# Altium PCB MM32F103_LQFP100_CoreBoard V1.1.PcbDoc
Units mil, origin at the board's own origin, x right, y up, seen from the top; angles counter-clockwise.
Board outline 3620 x 2165 mil, 2 copper layers (Top Layer, Bottom Layer); 65 components, 116 nets, 447 pads, 112 vias.
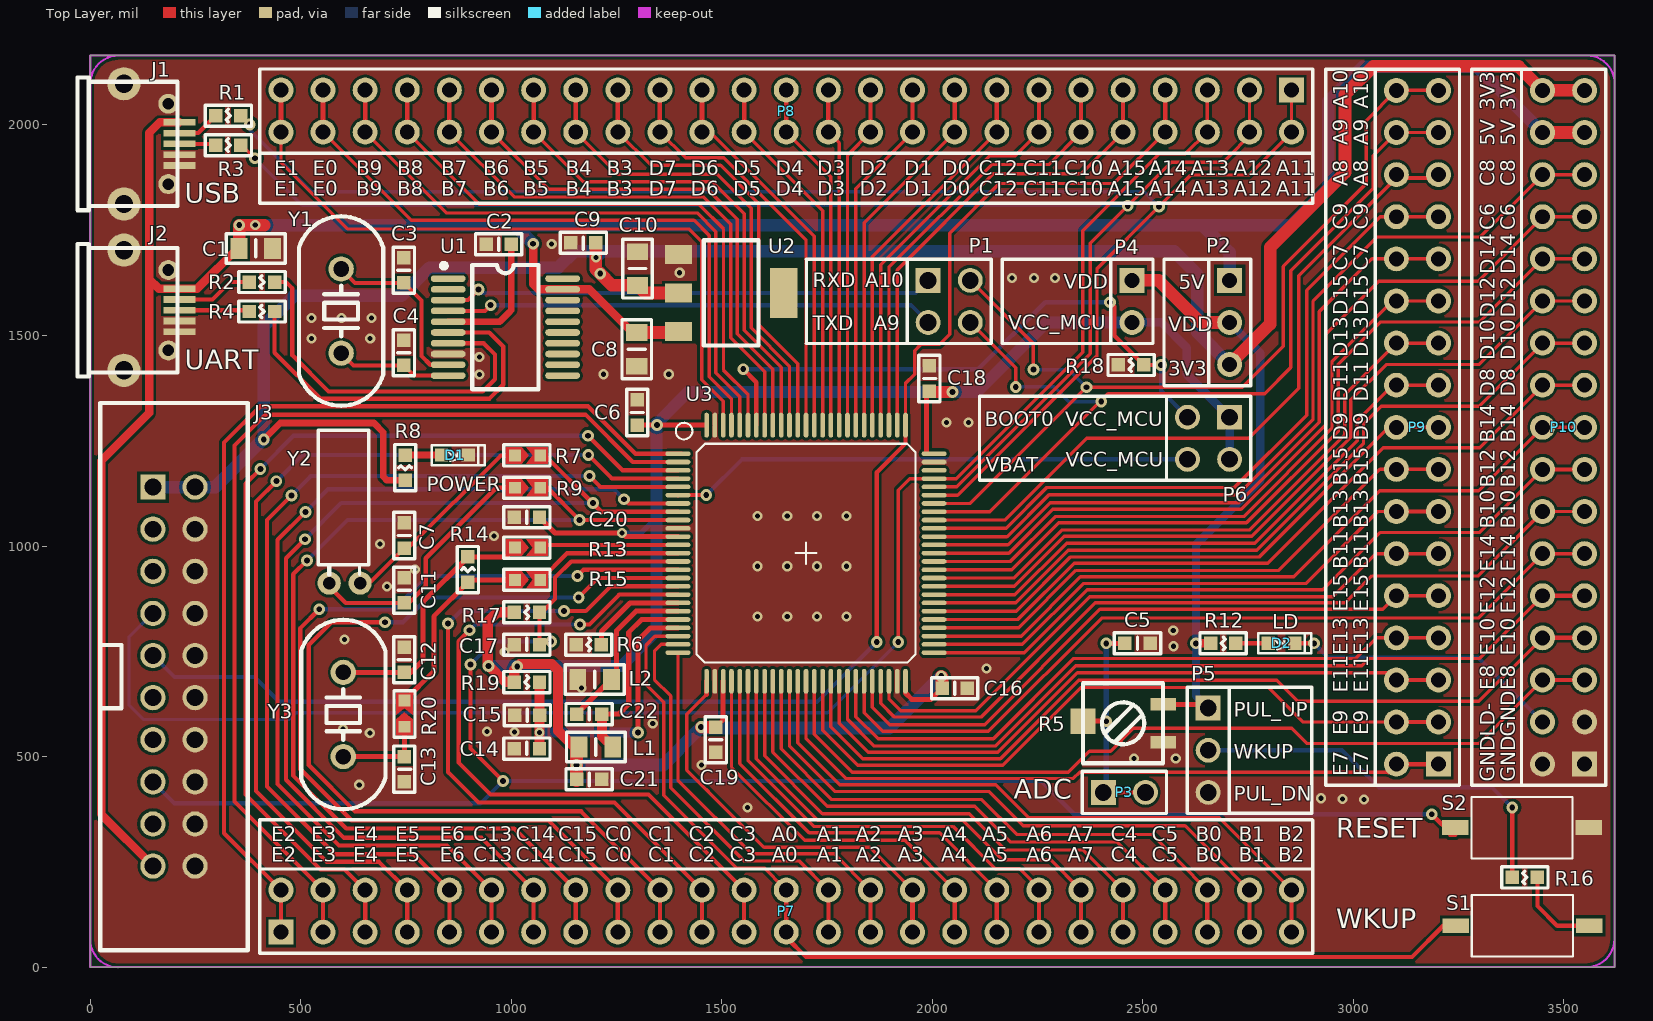
[diagram p0: Top Layer view]
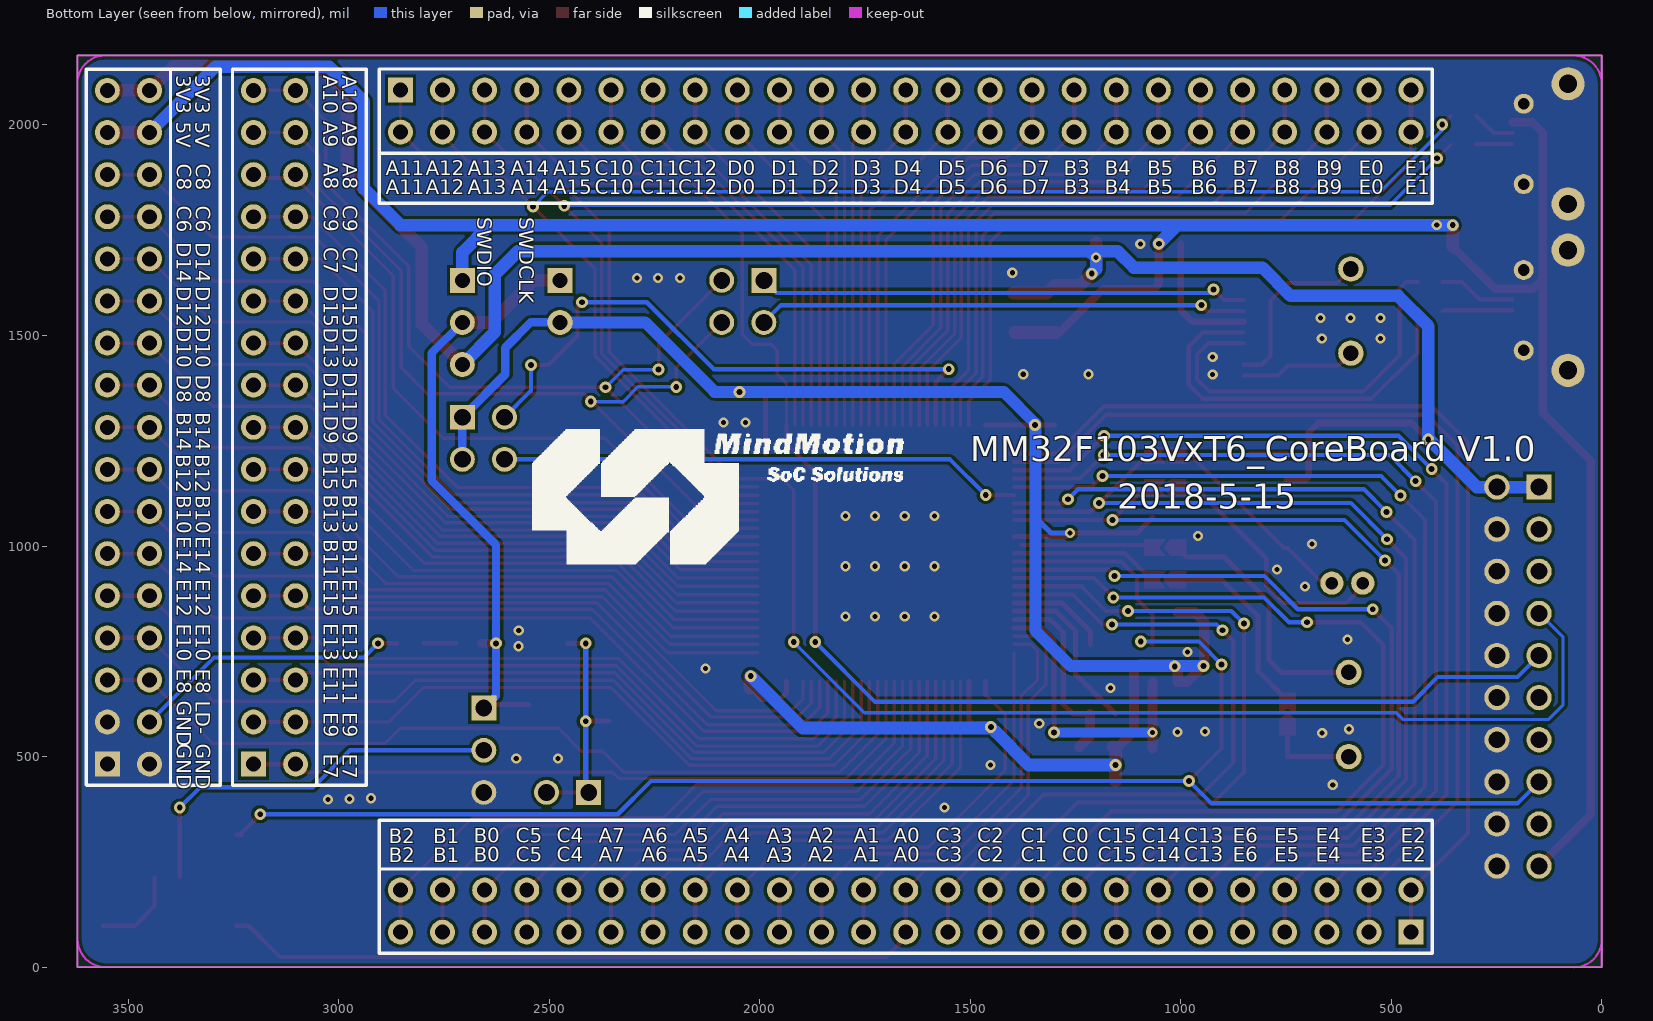
[diagram p1: Bottom Layer view, seen from below]

## Layer stack, top to bottom
Top Layer: signal copper 1.4
Dielectric: dielectric 12.6, FR-4, Dk 4.8
Bottom Layer: signal copper 1.4

## Board outline
0,0 0,2165 3620,2165 3620,0

## Design rules (kind name [scope] priority, off if disabled: settings)
Clearance [All] p1: gap=7
MinimumSolderMaskSliver [All] p1: minsoldermaskwidth=8
PolygonConnect [All] p1: connectstyle=Direct reliefconductorwidth=10 reliefentries=4 polygonreliefangle="90 Angle"
RoutingVias [All] p1: holewidth=28 width=50 viastyle="Through Hole" minholewidth=14 minwidth=28 maxholewidth=30 maxwidth=50
SilkToSilkClearance [All] p1: silktosilkclearance=0
SilkscreenOverComponentPads [All] p1: minsilkscreentomaskgap=8
SolderMaskExpansion [All] p1: expansion=4
Width [All] p1: maxlimit=50 minlimit=8 preferedwidth=10
25 further rules are at their usual default settings.

## Components (designator, comment, footprint, x,y, rotation, side; value= is the part's Value field where it differs from the comment)
C1 "4.7uF" C-0805 393,1707 r180 top
C2 "104" C-0603 970,1717 r0 top
C3 "22pF" C-0603 745,1655 r270 top
C4 "22pF" C-0603 745,1459 r270 top
C5 "104" C-0603 2487.23,769 r180 top
C6 "104" C-0603 1299,1317 r90 top
C7 "15pF" C-0603 746,1025 r270 top
C8 "4.7uF" C-0805 1298,1467 r90 top
C9 "104" C-0603 1171,1720 r0 top
C10 "10uF" C-0805 1300,1659 r270 top
C11 "15pF" C-0603 746,895 r270 top
C12 "22pF" C-0603 746,730 r270 top
C13 "22pF" C-0603 746,470 r90 top
C14 "1uF" C-0603 1037,519 r180 top
C15 "103" C-0603 1038,598 r180 top
C16 "104" C-0603 2053,662 r180 top
C17 "104" C-0603 1037,765.86 r180 top
C18 "104" C-0603 1993,1398 r90 top
C19 "104" C-0603 1486,540 r270 top
C20 "104" C-0603 1037,1068 r180 top
C21 "1uF" C-0603 1185,446 r0 top
C22 "1uF" C-0603 1185,601 r180 top
D1 "RED" LED-0603 866,1216 r270 top
D2 "BLUE" LED-0603 2829,769 r270 top
J1 "USB_Micro_OX" USB_MICRO_OX_S 206,1955 r90 top
J2 "USB_Micro_OX" USB_MICRO_OX_S 206,1560 r90 top
J3 "CON20A" HEADERBG10X2H 149,1140 r90 top
L1 "Res Semi" C-0805 1201,523 r0 top
L2 "Res Semi" C-0805 1198,682.86 r0 top
P1 "Header 2X2" HDR2X2 1990,1631 r270 top
P2 "Header 3" HDR1X3#1 2706,1631 r270 top
P3 "Header 2" HDR1X2#1 2406,415 r0 top
P4 "Header 2" HDR1X2#2 2474,1631 r270 top
P5 "Header 3" HDR1X3#2 2655,615 r270 top
P6 "Header 2X2" HDR2X2 2706,1305.94 r180 top
P7 "Header 25X2" HDR2X25 453,83 r0 top
P8 "Header 25X2" HDR2X25 2853,2083 r180 top
P9 "Header 17X2" HDR2X17 3202,482 r90 top
P10 "Header 17X2" HDR2X17 3549,482 r90 top
R1 "22R" R-0603 328,2022 r0 top
R2 "22R" R-0603 408,1627 r0 top
R3 "22R" R-0603 328,1952 r0 top
R4 "22R" R-0603 408,1557 r0 top
R5 "10K" R-VR-S 2453,579 r90 top
R6 "0R" R-0603 1184,765.71 r180 top
R7 "NC" NC-0603#1 1009,1216.14 r0 top
R8 "4.7K" R-0603 748,1186 r270 top
R9 "NC" NC-0603#1 1009,1139.29 r0 top
R12 "3K" R-0603 2690.7,769 r180 top
R13 "NC" NC-0603#1 1009,997.43 r0 top
R14 "510K" R-0603 897,944 r270 top
R15 "NC" NC-0603#1 1009,920.57 r0 top
R16 "1K" R-0603 3407,213 r0 top
R17 "47K" R-0603 1037,842.71 r180 top
R18 "4.7K" R-0603 2472,1430 r0 top
R19 "0R" R-0603 1037,677 r180 top
R20 "510R" NC-0603#2 746,575 r90 top
S1 "SW-PB" 3x6x2.5 3281,171 r0 top
S2 "SW-PB" 3x6x2.5 3280,404 r0 top
U1 "CH340T" SSOP-20_208MIL 986,1520 r270 top
U2 "LD1117" SOT223 1522,1601 r270 top
U3 "MM32F103VET6" LQFP100 1700,983 r0 top
Y1 "12M" X'TAL 596,1458 r90 top
Y2 "32.768K" X'TAL-32768 641,912 r180 top
Y3 "8M" X'TAL 601,500 r90 top

## Footprints (in the part's own frame and the unit in brackets; to place one, negate y for a bottom-side part, rotate by r counter-clockwise, add the part's x,y. Pads: shape width x height; smd on the part's side, far side on the other; paste and mask are expansions set on the pad)
3x6x2.5 [mm]
  rect 1.6x0.9 smd: 1(-0.965,-1.85) 2(7.087,-1.85)
  silkscreen extent 0,-3.71 6.1,0
C-0603 [mil]
  rect 32x32 smd: 1(-30,0) 2(30,0)
  silkscreen extent -55,-25 55,25
C-0805 [mil]
  rect 40x50 smd: 1(-40,0) 2(40,0)
  silkscreen extent -70,-35 70,35
HDR1X2#1 [mm] "Connector; Header; 2 Position"
  rect 1.5x1.5 hole 1.016: 1(0,0)
  round 1.5 hole 1.016: 2(2.54,0)
  silkscreen extent -1.27,-1.27 3.81,1.27
HDR1X2#2 [mm] "Connector; Header; 2 Position"
  rect 1.5x1.5 hole 0.9: 1(0,0)
  round 1.5 hole 0.9: 2(2.54,0)
  silkscreen extent -1.27,-1.27 3.81,1.27
HDR1X3#1 [mm] "Connector; Header; 3 Position"
  rect 1.5x1.5 hole 0.9: 1(0,0)
  round 1.5 hole 0.9: 2(2.54,0) 3(5.08,0)
  silkscreen extent -1.27,-1.27 6.35,1.27
HDR1X3#2 [mm] "Connector; Header; 3 Position"
  rect 1.5x1.5 hole 1.016: 1(0,0)
  round 1.5 hole 1.016: 2(2.54,0) 3(5.08,0)
  silkscreen extent -1.27,-1.27 6.35,1.27
HDR2X2 [mm] "Connector; Header; 2x2 Position"
  rect 1.5x1.5 hole 1.016: 1(0,0)
  round 1.5 hole 1.016: 2(0,2.54) 3(2.54,0) 4(2.54,2.54)
  silkscreen extent -1.27,-1.27 3.81,3.81
HDR2X17 [mm] "Connector; Header; 17x2 Position"
  rect 1.5x1.5 hole 0.9: 1(0,0)
  round 1.5 hole 0.9: 2(0,2.54) 3(2.54,0) 4(2.54,2.54) 5(5.08,0) 6(5.08,2.54) 7(7.62,0) 8(7.62,2.54) 9(10.16,0) 10(10.16,2.54) 11(12.7,0) 12(12.7,2.54) 13(15.24,0) 14(15.24,2.54) 15(17.78,0) 16(17.78,2.54) 17(20.32,0) 18(20.32,2.54) 19(22.86,0) 20(22.86,2.54) 21(25.4,0) 22(25.4,2.54) 23(27.94,0) 24(27.94,2.54) 25(30.48,0) 26(30.48,2.54) 27(33.02,0) 28(33.02,2.54) 29(35.56,0) 30(35.56,2.54) 31(38.1,0) 32(38.1,2.54) 33(40.64,0) 34(40.64,2.54)
  silkscreen extent -1.27,-1.27 41.91,3.81
HDR2X25 [mm] "Connector; Header; 25x2 Position"
  rect 1.5x1.5 hole 0.9: 1(0,0)
  round 1.5 hole 0.9: 2(0,2.54) 3(2.54,0) 4(2.54,2.54) 5(5.08,0) 6(5.08,2.54) 7(7.62,0) 8(7.62,2.54) 9(10.16,0) 10(10.16,2.54) 11(12.7,0) 12(12.7,2.54) 13(15.24,0) 14(15.24,2.54) 15(17.78,0) 16(17.78,2.54) 17(20.32,0) 18(20.32,2.54) 19(22.86,0) 20(22.86,2.54) 21(25.4,0) 22(25.4,2.54) 23(27.94,0) 24(27.94,2.54) 25(30.48,0) 26(30.48,2.54) 27(33.02,0) 28(33.02,2.54) 29(35.56,0) 30(35.56,2.54) 31(38.1,0) 32(38.1,2.54) 33(40.64,0) 34(40.64,2.54) 35(43.18,0) 36(43.18,2.54) 37(45.72,0) 38(45.72,2.54) 39(48.26,0) 40(48.26,2.54) 41(50.8,0) 42(50.8,2.54) 43(53.34,0) 44(53.34,2.54) 45(55.88,0) 46(55.88,2.54) 47(58.42,0) 48(58.42,2.54) 49(60.96,0) 50(60.96,2.54)
  silkscreen extent -1.27,-1.27 62.23,3.81
HEADERBG10X2H [mil]
  rect 60x60 hole 40: 1(0,0)
  round 60 hole 40: 2(0,-100) 3(-100,0) 4(-100,-100) 5(-200,0) 6(-200,-100) 7(-300,0) 8(-300,-100) 9(-400,0) 10(-400,-100) 11(-500,0) 12(-500,-100) 13(-600,0) 14(-600,-100) 15(-700,0) 16(-700,-100) 17(-800,0) 18(-800,-100) 19(-900,0) 20(-900,-100)
  silkscreen extent -1100,-225 200,125
LED-0603 [mm]
  rect 0.8x0.8 smd: 1(0,-0.8) 2(0,0.8)
  silkscreen extent -0.6,-1.4 0.6,1.8
LQFP100 [mm]
  oval 1.5x0.279 smd: 1(-7.725,6) 2(-7.725,5.5) 3(-7.725,5) 4(-7.725,4.5) 5(-7.725,4) 6(-7.725,3.5) 7(-7.725,3) 8(-7.725,2.5) 9(-7.725,2) 10(-7.725,1.5) 11(-7.725,1) 12(-7.725,0.5) 13(-7.725,0) 14(-7.725,-0.5) 15(-7.725,-1) 16(-7.725,-1.5) 17(-7.725,-2) 18(-7.725,-2.5) 19(-7.725,-3) 20(-7.725,-3.5) 21(-7.725,-4) 22(-7.725,-4.5) 23(-7.725,-5) 24(-7.725,-5.5) 25(-7.725,-6) 51(7.725,-6) 52(7.725,-5.5) 53(7.725,-5) 54(7.725,-4.5) 55(7.725,-4) 56(7.725,-3.5) 57(7.725,-3) 58(7.725,-2.5) 59(7.725,-2) 60(7.725,-1.5) 61(7.725,-1) 62(7.725,-0.5) 63(7.725,0) 64(7.725,0.5) 65(7.725,1) 66(7.725,1.5) 67(7.725,2) 68(7.725,2.5) 69(7.725,3) 70(7.725,3.5) 71(7.725,4) 72(7.725,4.5) 73(7.725,5) 74(7.725,5.5) 75(7.725,6)
  oval 0.279x1.5 smd: 26(-6,-7.725) 27(-5.5,-7.725) 28(-5,-7.725) 29(-4.5,-7.725) 30(-4,-7.725) 31(-3.5,-7.725) 32(-3,-7.725) 33(-2.5,-7.725) 34(-2,-7.725) 35(-1.5,-7.725) 36(-1,-7.725) 37(-0.5,-7.725) 38(0,-7.725) 39(0.5,-7.725) 40(1,-7.725) 41(1.5,-7.725) 42(2,-7.725) 43(2.5,-7.725) 44(3,-7.725) 45(3.5,-7.725) 46(4,-7.725) 47(4.5,-7.725) 48(5,-7.725) 49(5.5,-7.725) 50(6,-7.725) 76(6,7.725) 77(5.5,7.725) 78(5,7.725) 79(4.5,7.725) 80(4,7.725) 81(3.5,7.725) 82(3,7.725) 83(2.5,7.725) 84(2,7.725) 85(1.5,7.725) 86(1,7.725) 87(0.5,7.725) 88(0,7.725) 89(-0.5,7.725) 90(-1,7.725) 91(-1.5,7.725) 92(-2,7.725) 93(-2.5,7.725) 94(-3,7.725) 95(-3.5,7.725) 96(-4,7.725) 97(-4.5,7.725) 98(-5,7.725) 99(-5.5,7.725) 100(-6,7.725)
  silkscreen extent -7.86,-6.6 6.6,7.87
NC-0603#1 [mil]
  rect 28x28 smd: 1(0,-1) 2(60,-1)
  Top Layer region: 26,19 42,-1 26,-21 78,-21 78,19
  Top Layer region: -22,-21 16,-21 32,-1 16,19 -22,19
  silkscreen extent -27,-26 83,24
NC-0603#2 [mil]
  rect 28x28 smd: 1(-4,-0.33) 2(58,-0.33)
  Top Layer region: 24,19.67 40,-0.33 24,-20.33 76,-20.33 76,19.67
  Top Layer region: -24,-20.33 14,-20.33 30,-0.33 14,19.67 -24,19.67
  silkscreen extent -29,-25 81,25
R-0603 [mil]
  rect 32x32 smd: 1(-30,0) 2(30,0)
  silkscreen extent -55,-25 55,25
R-VR-S [mil]
  rect 30x60 smd: 1(-45,-95) 3(45,-95)
  rect 60x60 smd: 2(5,95)
  silkscreen extent -95,-95 95,95
SOT223 [mil]
  rect 45x65 smd: 1(-91,-125) 2(0,-125) 3(91,-125)
  rect 118x65 smd: 4(0,125)
  silkscreen extent -125,-65 125,65
SSOP-20_208MIL [mm]
  oval 0.4x2.1 smd mask+0.051: 1(-2.925,-3.45) 2(-2.275,-3.45) 3(-1.625,-3.45) 4(-0.975,-3.45) 5(-0.325,-3.45) 6(0.325,-3.45) 7(0.975,-3.45) 8(1.625,-3.45) 9(2.275,-3.45) 10(2.925,-3.45) 11(2.925,3.45) 12(2.275,3.45) 13(1.625,3.45) 14(0.975,3.45) 15(0.325,3.45) 16(-0.325,3.45) 17(-0.975,3.45) 18(-1.625,3.45) 19(-2.275,3.45) 20(-2.925,3.45)
  silkscreen extent -3.85,-3.86 3.75,2
USB_MICRO_OX_S [mm]
  rect 0.4x1.905 smd: 1(1.3,-0.153) 2(0.65,-0.153) 3(0,-0.153) 4(-0.65,-0.153) 5(-1.3,-0.153)
  round 1.2 hole 0.7: 6(2.425,0.52) 7(-2.425,0.52)
  round 2 hole 1.1: 8(-3.625,3.2) 9(3.625,3.2)
  silkscreen extent -4,-0.04 4,6
X'TAL [mil]
  round 60 hole 37: 1(0,0) 2(200,0)
  silkscreen extent -125,-100 325,100
X'TAL-32768 [mil]
  round 55 hole 30: 1(73.35,0) 2(0,0)
  silkscreen extent -21,-363 99,-20

## Part data
C1 C2 C3 C4 C5 C6 C7 C8 C9 C10 C11 C12 C13 C14 C15 C16 C18 C19 C20 C21 C22: library part CAP, "Capacitor"
C17: library part Cap, "Capacitor"
D1 D2: library part LED0, "Typical INFRARED GaAs LED"
L1 L2: "Semiconductor Resistor"
P1 P6: "Header, 2-Pin, Dual row"
P2 P5: "Header, 3-Pin"
P3 P4: "Header, 2-Pin"
P7 P8: "Header, 25-Pin, Dual row"
P9 P10: "Header, 17-Pin, Dual row"
R1 R2 R3 R4 R6 R7 R8 R9 R12 R13 R15 R16 R17 R18 R19 R20: library part Res2, "Resistor"
R5: library part "RESISTOR VAR"
R14: library part RES
S1 S2: "Switch"
U2: library part LD1117/SOT_0
U3: library part LQFP100
Y1 Y2 Y3: library part XTAL, "Crystal Oscillator"

## Via types
v1: diameter 28, hole 14, Top Layer to Bottom Layer, 57 vias
v2: diameter 24, hole 12, Top Layer to Bottom Layer, 55 vias

## Nets (pads, with @x,y where several pads share a name; then routed paths per layer and width w, separated by ;. In a path a pad name is that pad's centre, name@x,y a point inside that pad or via, vN(x,y) a via of type N, cw(c..) or ccw(c..) an arc to the next point about the centre after c; other vN are vias at no path point)
3V3: C9.2 C10.2 J3.1 J3.2 P2.3 P10.33 P10.34 R8.2 U2.2 | length 5330.4
  Top Layer w16: v1(412.19,1252.81) 451.37,1292 674,1292 696,1270 696,1165 705,1156 R8.2
  Top Layer w30: v2@1201,1683 1201,1657 v1(1211.24,1646.76) 1239,1619 C10.2 1318,1601 U2.2 ; v2(1201,1685) C9.2 ; P2.3 2802,1527 2802,1709 2980,1887 2980,2072 3047,2139 3392,2139 P10.34 P10.33
  Bottom Layer w30: J3.1 J3.2 297,1140 v1@409.81,1252.81 ; v1(1211.24,1646.76) 1201,1657 v2(1201,1685) 1216,1700 ; P2.3 2629,1508 2629,1645 2574,1700 1216,1700 ; v1@409.81,1252.81 v1(412.19,1252.81) v1@412.19,1255.19 ; v1@409.81,1252.81 v1@412.19,1255.19 ; v1@412.19,1255.19 412.19,1522.19 484,1594 739,1594 806,1661 1111,1661 1150,1700 1216,1700
+5V: C1.2 C8.2 J1.1 J2.1 J3.19 P2.1 P10.31 P10.32 U1.19 U2.3 | length 6551.2
  Top Layer w20: J3.19 26,363 26,1202 140,1316 140,1634 ; J1.1 165,2006.18 140,1981.18 140,1646 140,1634 ; C1.2@353,1710 254.18,1611.18 J2.1 162.82,1611.18 140,1634 ; v1(1052,1718) 1052,1622 1064.43,1609.57 U1.19 1185.43,1609.57 1288,1507 C8.2 ; U2.3@1394,1507 U2.3
  Top Layer w30: C1.2@353,1710 354,1711 v1(354,1762) v2(392,1762) 413,1762 ; C8.2 U2.3@1394,1507 ; P10.32 P10.31
  Bottom Layer w30: v1(354,1762) v2(392,1762) 983,1762 1008,1762 ; 1016,1762 1008,1762 ; v1(1052,1718) 1008,1762 ; P2.1 2706,1697 2641,1762 ; P10.32 3293,2138 3022,2138 2940,2056 2940,1849 2853,1762 2641,1762 ; 1008,1762 2616,1762 2641,1762
BOOT0: P6.3 R18.2 U3.94 | length 1455.8
  Top Layer w10: v1(1551,1420) 1581.89,1389.11 U3.94 ; v1(2422,1579) 2432.47,1568.53 2432.47,1499.53 R18.2 v1(2543,1430)
  Bottom Layer w10: v1(1551,1420) 2109,1420 2268,1579 v1(2422,1579) ; v1(2543,1430) 2543,1368.94 P6.3
CH340_DN: R2.2 U1.7 | length 916.7
  Top Layer w10: R2.2 465,1627 480,1612 480,1453 566,1367 932,1367 961,1396 961,1455 934.39,1481.61 U1.7
CH340_DP: R4.2 U1.6 | length 935.4
  Top Layer w10: R4.2 438,1459 547,1350 948,1350 981,1383 981,1474 947.8,1507.2 U1.6
GND: C1.1 C2.1 C3.1 C4.1 C5.1 C6.2 C7.1 C8.1 C9.1 C10.1 C11.1 C12.1 C13.1 C14.2 C15.2 C16.1 C17.2 C18.2 C19.2 C20.2 C21.2 D1.2 J1.4 J1.5 J1.6 J1.7 J1.8 J1.9 J2.4 J2.5 J2.6 J2.7 J2.8 J2.9 J3.4 J3.6 J3.8 J3.10 J3.12 J3.14 J3.16 J3.18 J3.20 L2.1 P5.3 P10.1 P10.2 P10.3 R5.1 R6.2 R18.1 S2.2 U1.8 U2.1 U3.10 U3.27 U3.49 U3.74 U3.99
  other v2: 1561,379 3025,398 2974,399 2923,401 639,433 1452,480 2479,495 2578,495 664,556 1008,558 942,560 600,565 1336,579 1167,663 2129,709 984,748 2573,762 604,778 2572,799 1585,833 1655.33,833 1725.67,833 1796,833 705,904 771,944 1585,952 1655.33,952 1725.67,952 1796,952 688,1005 959,1024 1585,1071 1655.33,1071 1725.67,1071 1796,1071 2034,1293 2086,1293 924,1407 1219,1408 1374,1408 924,1449 526,1493 665,1493 526,1542 597,1542 668,1542 2189,1637 2241,1637 2291,1637 1400,1649 1096,1717
LD-: D2.2 P10.4 | length 666
  Top Layer w10: D2.2 v1(2906,769)
  Bottom Layer w10: v1(2906,769) 2940,735 3296,735 P10.4
NetC3_2: C3.2 U1.9 Y1.2 | length 425.8
  Top Layer w10: Y1.2 629,1625 C3.2 787,1583 787,1451 807.57,1430.43 U1.9
NetC4_2: C4.2 U1.10 Y1.1 | length 276.2
  Top Layer w10: Y1.1 625,1429 C4.2 769.16,1404.84 U1.10
NetC5_2: C5.2 P3.1 P3.2 R5.2 | length 546.2
  Top Layer w10: P3.1 P3.2
  Top Layer w12: R5.2 v1(2413,584) ; v1(2413,769) C5.2
  Bottom Layer w12: P3.1@2413,422 v1(2413,769)
NetC7_2: C7.2 R7.1 Y2.2 | length 520.4
  Top Layer w10: Y2.2 663,912 C7.2 755,995 975.14,1215.14 R7.1 982.14,1215.14
NetC11_2: C11.2 R9.1 Y2.1 | length 630.2
  Top Layer w10: Y2.1@567.65,891.35 Y2.1 ; Y2.1@567.65,904.35 607,865 C11.2 757,865 797,905 797,971 964.29,1138.29 R9.1
NetC12_2: C12.2 R13.1 R14.1 Y3.2 | length 612.2
  Top Layer w12: Y3.2 C12.2 762,700 790,728 790,867 R14.1 986.57,974 R13.1
NetC13_2: C13.2 R20.1 Y3.1 | length 216.1
  Top Layer w12: Y3.1 C13.2 746,570.67 R20.1
NetC14_1: C14.1 C15.1 R19.1 U3.22 | length 718.2
  Top Layer w12: v1(1301,557) 1301,776 1330.83,805.83 U3.22
  Top Layer w24: C14.1 R19.1
  Bottom Layer w24: v2(1067,557) v1(1301,557)
NetD1_1: D1.1 R8.1 | length 86.5
  Top Layer w16: R8.1 D1.1
NetD2_1: D2.1 R12.1 | length 76.8
  Top Layer w10: R12.1 D2.1
NetJ2_2: J2.2 R2.1 | length 183.1
  Top Layer w10: J2.2 290.59,1585.59 332,1627 R2.1
NetJ2_3: J2.3 R4.1 | length 167.2
  Top Layer w10: J2.3 375,1560 R4.1
NetP1_1: P1.1 U1.3 | length 1165.9
  Top Layer w10: U1.3 896.98,1583.98 v1(922,1609)
  Bottom Layer w10: v1(922,1609) 930,1601 1960,1601 P1.1
NetP1_3: P1.3 U1.4 | length 1162.4
  Top Layer w10: U1.4 937.39,1558.39 v1(951,1572)
  Bottom Layer w10: v1(951,1572) 1949,1572 P1.3
NetP5_2: P5.2 R16.1 | length 944.3
  Top Layer w10: R16.1 v1(3377,379)
  Bottom Layer w10: P5.2 2973,515 3061,427 3329,427 v1(3377,379)
NetR6_1: R6.1 U3.19 | length 240.3
  Top Layer w12: R6.1@1214,766.71 1214,797 1281.89,864.89 U3.19
NetR13_2: R13.2 U3.12 | length 311.5
  Top Layer w10: R13.2 1075.26,1002.68 U3.12@1377.87,1002.68
NetR14_2: R14.2 R15.1 R20.2 | length 457.7
  Top Layer w12: R20.2 816,702.67 816,833 R14.2 902.57,919.57 R15.1
NetR15_2: R15.2 U3.13 | length 353.1
  Top Layer w10: R15.2 1132.43,983 U3.13
NetR16_2: R16.2 S1.2 | length 210.4
  Top Layer w10: R16.2 3437,145 3483.83,98.17 S1.2
NRST: C17.1 J3.15 R17.1 S2.1 U3.14 | length 4234.5
  Top Layer w10: v1(903,719) 903,519 v1(980,442) ; v1(1095,773) 1074.14,773 C17.1 R17.1 1072.71,842.71 1104,874 1104,925 1142.32,963.32 U3.14 ; v1(3186,363) S2.1@3234.83,314.17 ; S2.1@3229.17,314.17 S2.1@3234.83,314.17 ; S2.1@3242,314.17 S2.1@3234.83,314.17
  Bottom Layer w10: J3.15 200,389 927,389 v1(980,442) 2258,442 2337,363 v1(3186,363) ; v1(903,719) 957,773 v1(1095,773)
PA0: P7.25 P7.26 S1.1 U3.23 | length 2595.4
  Top Layer w8: U3.23 1341.15,786.15 1320,765 1320,671 1362,629 1362,408 1534.5,235.5 1600.5,235.5 P7.26@1647.38,188.62
  Top Layer w10: P7.26@1647.38,188.62 P7.26 P7.25 1653,71 1700,24 3139,24 3213.17,98.17 S1.1
PA1: P7.27 P7.28 U3.24 | length 977.5
  Top Layer w8: U3.24 1356.47,766.47 1340,750 1340,683 1379,644 1379,426 1553,252 1684,252 P7.28
  Top Layer w10: P7.27 P7.28
PA2: P7.29 P7.30 U3.25 | length 967.9
  Top Layer w8: U3.25 1395.87,444.13 1571,269 1767,269 P7.30
  Top Layer w10: P7.29 P7.30
PA3: P7.31 P7.32 U3.26 | length 999
  Top Layer w8: 1463.78,421.22 1474.21,410.79 ; 1463.78,647.78 1417,601 1417,468 1474.21,410.79 ; P7.32 1851,285 1600,285 1474.21,410.79
  Top Layer w12: 1463.78,647.78 U3.26 ; P7.31 P7.32
PA4: P7.33 P7.34 U3.29 | length 954.9
  Top Layer w8: U3.29 1522.83,475.17 1697,301 1935,301 P7.34
  Top Layer w10: P7.33 P7.34
PA5: P7.35 P7.36 U3.30 | length 1030.3
  Top Layer w8: U3.30 1542.52,483.48 1707,319 1894,319 2017,319 P7.36
  Top Layer w10: P7.35 P7.36
PA6: P7.37 P7.38 U3.31 | length 1109.9
  Top Layer w8: U3.31 1562.2,489.79 1717.99,334 2049,334 2149,234 2207,234 P7.38@2253,188
  Top Layer w10: P7.37 2253,176 P7.38 P7.38@2253,188
PA7: P7.39 P7.40 U3.32 | length 1184.1
  Top Layer w8: U3.32 1581.89,495.11 1728,349 2072,349 2166,255 2281,255 P7.40
  Top Layer w10: P7.39 P7.40
PA8: P9.29 P9.30 U3.67 | length 1694
  Top Layer w8: U3.67 2172.11,1061.74 2366.37,1256 2751,1256 2870,1375 2870,1642 P9.30@3102,1874
  Top Layer w10: P9.30@3102,1874 3194,1874 P9.29
PA9: P1.4 P9.31 P9.32 U3.68 | length 2166
  Top Layer w8: U3.68 2136.43,1081.43 2417,1362 2789,1362 2851,1424 2851,1654 3047,1850 3047,1927 P9.32 P9.31 ; P1.4 2198,1423 v1(2198,1378)
  Bottom Layer w8: v1(2198,1378) 2289,1378 2324,1343 v1(2401,1343)
PA10: P1.2 P9.33 P9.34 U3.69 | length 2220.3
  Top Layer w8: U3.69 2090.11,1101.11 v1(2366,1377) 2736,1377 2833,1474 2833,1664 3030,1861 3030,2010 P9.34 P9.33 ; P1.2 2240,1481 v1(2240,1419)
  Bottom Layer w8: v1(2240,1419) 2324,1419 v1(2366,1377)
PA11: P8.1 P8.2 R1.2 U3.70 | length 3691.3
  Top Layer w8: R1.2 v1(379,2001) ; U3.70 2059.79,1120.79 2391,1452 2391,1659 v1(2538,1806) 2613,1881 2648,1881 2751,1881 P8.2 P8.1
  Bottom Layer w8: v1@379,1988 526,1841 2503,1841 v1(2538,1806)
PA12: P8.3 P8.4 R3.2 U3.71 | length 3522.5
  Top Layer w8: R3.2@358,1954 v1(391,1921) ; U3.71 2058.27,1140.48 2375,1457.21 2375,1719 v1(2464,1808) 2567.5,1911.5 2690.5,1911.5 2703.56,1924.56 2753,1974 P8.4 P8.3
  Bottom Layer w8: v1(391,1921) 503,1809 v1@2464,1809
PA13: J3.7 P8.5 P8.6 U3.72 | length 3874.4
  Top Layer w8: v1(1919,772) 1919,1133 1946.17,1160.17 U3.72 2056.74,1160.17 2357,1460.43 2357,1668 2357,1749 2539.07,1931.07 2601.07,1931.07 P8.6 P8.5
  Bottom Layer w8: J3.7 92,783 92,623 127,588 472,588 488,604 1751,604 v1(1919,772)
PA14: J3.9 P8.7 P8.8 U3.76 | length 3604.3
  Top Layer w8: U3.76 1936.22,1386.22 1958,1408 1958,1464 1973,1479 2017,1479 2041,1503 2041,1743 2159,1861 2431,1861 P8.8
  Top Layer w10: v1(1868,772) 1868,1175 1936.22,1243.22 U3.76 U3.76@1937,1286.35 ; P8.8 P8.7
  Bottom Layer w10: J3.9 200,689 390,689 449,630 1726,630 v1(1868,772)
PA15: P8.9 P8.10 U3.77 | length 1140.5
  Top Layer w8: U3.77 1916.53,1395.53 1916.53,1655.53 2145,1884 2354,1884 P8.10
  Top Layer w10: P8.10 P8.9
PB0: P7.45 P7.46 U3.35 | length 1425.4
  Top Layer w8: U3.35 1640.94,518.06 1761,398 2117,398 2200,315 2521,315 2585.74,250.26 ; 2576,260 2585.74,250.26 ; P7.46 2585.74,250.26
  Top Layer w10: P7.45 P7.46
PB1: P7.47 P7.48 U3.36 | length 1507.5
  Top Layer w8: U3.36 1660.63,525.37 1769,417 1995,417 2135,417 2216,336 2600,336 2668,268 ; 2654,282 2668,268 ; P7.48 2668,268
  Top Layer w10: P7.47 P7.48
PB2: P7.49 P7.50 U3.37 | length 1563.7
  Top Layer w8: U3.37 1680.32,532.68 1780,433 2151,433 2229,355 2681,355 2731,305 P7.50
  Top Layer w10: P7.49 P7.50
PB3: P8.33 P8.34 U3.89 | length 1069.5
  Top Layer w8: P8.34 1332,1904 1497,1904 1588,1813 1588,1525 1680.32,1432.68 U3.89
  Top Layer w11: P8.34 P8.33
PB4: P8.35 P8.36 U3.90 | length 1144.4
  Top Layer w8: P8.36 1253,1883 1489,1883 1570,1802 1570,1518 1660.63,1427.37 U3.90
  Top Layer w10: P8.36 P8.35
PB5: P8.37 P8.38 U3.91 | length 1218.7
  Top Layer w8: P8.38 1171,1865 1477,1865 1553,1789 1553,1512 1640.94,1424.06 U3.91
  Top Layer w11: P8.38 P8.37
PB6: P8.39 P8.40 U3.92 | length 1293.5
  Top Layer w8: P8.40 1089,1847 1466,1847 1537,1776 1537,1504 1621.26,1419.74 U3.92
  Top Layer w11: P8.40 P8.39
PB7: P8.41 P8.42 U3.93 | length 1369
  Top Layer w8: P8.42 1007,1829 1456,1829 1521,1764 1521,1495 1601.58,1414.42 U3.93
  Top Layer w11: P8.42 P8.41
PB8: P8.43 P8.44 U3.95 | length 1436.2
  Top Layer w8: P8.44 925,1811 1445.95,1811 1504,1752.95 1504,1417.95 1562.2,1359.75 U3.95
  Top Layer w11: P8.44 P8.43
PB9: P8.45 P8.46 U3.96 | length 1513.6
  Top Layer w8: P8.46 845,1791 1441.2,1791 1486,1746.2 1486,1411.2 1542.52,1354.68 U3.96
  Top Layer w10: P8.46 P8.45
PB10: P10.13 P10.14 U3.47 | length 1939.6
  Top Layer w8: U3.47 1877.17,626.83 1910,594 2097.79,594 2116,594 2387,865 2980,865 3044,929 3296,929 P10.14 P10.13
PB11: P9.11 P9.12 U3.48 | length 1513
  Top Layer w8: U3.48 1896.85,637.15 1925,609 2091,609 2103,609 2374,880 2951,880 3053,982 P9.12 P9.11
PB12: P10.15 P10.16 U3.51 | length 1725.1
  Top Layer w8: U3.51 2218.15,746.78 2367.37,896 2927,896 3063,1032 3299,1032 P10.16
  Top Layer w10: P10.16 P10.15
PB13: P9.13 P9.14 U3.52 | length 1328.6
  Top Layer w8: U3.52 2213.8,766.47 2358.33,911 2887,911 3058,1082 P9.14
  Top Layer w10: P9.14 P9.13
PB14: P10.17 P10.18 U3.53 | length 1750.3
  Top Layer w8: U3.53 2210.85,786.15 2351.7,927 2858,927 3062,1131 3298,1131 P10.18 P10.17
PB15: P9.15 P9.16 U3.54 | length 1353.7
  Top Layer w8: U3.54 2204.83,805.83 2341,942 2823,942 3063,1182 P9.16 P9.15
PC0: P7.17 P7.18 U3.15 | length 2262.2
  Top Layer w10: v1(544,850) 499,805 499,470 620,349 1087,349 P7.18 P7.17 ; v1(1157,929) 1171.63,943.63 U3.15
  Bottom Layer w10: v1(544,850) 722,850 801,929 v1(1157,929)
PC1: P7.19 P7.20 U3.16 | length 2284.7
  Top Layer w10: v1(700,819) 573,819 519,765 519,480 629,370 1166,370 P7.20 P7.19 ; v1(1160,878) 1205.94,923.94 U3.16
  Bottom Layer w10: v1(700,819) 743,819 802,878 v1(1160,878)
PC2: P7.21 P7.22 U3.17 | length 1754.4
  Top Layer w10: v1(850,816) 850,463 922,391 1245,391 P7.22 P7.21 ; v1(1125,846) 1177,846 1235.26,904.26 U3.17
  Bottom Layer w10: v1(850,816) 880,846 v1(1125,846)
PC3: P7.23 P7.24 U3.18 | length 1758.2
  Top Layer w10: v1(901,800) 875,774 875,486 951,410 1326,410 P7.24 P7.23 ; v1(1163,814) 1186,814 1256.58,884.58 U3.18
  Bottom Layer w10: v1(901,800) 915,814 v1(1163,814)
PC4: P7.41 P7.42 U3.33 | length 1260.8
  Top Layer w8: U3.33 1601.58,501.42 1739,364 2088,364 2174,278 2358,278 P7.42
  Top Layer w10: P7.41 P7.42
PC5: P7.43 P7.44 U3.34 | length 1412
  Top Layer w8: U3.34 1621.26,510.74 1750,382 2101,382 2186,297 2439,297 P7.44
  Top Layer w10: 2499,237 P7.44 P7.43
PC6: P10.27 P10.28 U3.63 | length 2001.8
  Top Layer w8: U3.63 2182,983 2286,1087 2733,1087 2934,1288 2934,1503 3060,1629 3296,1629 P10.28 P10.27
PC7: P9.25 P9.26 U3.64 | length 1633.2
  Top Layer w8: U3.64 2179.68,1002.68 2280,1103 2727.79,1103 2919,1294.21 2919,1557 3044,1682 P9.26 P9.25
PC8: P10.29 P10.30 U3.65 | length 2065.5
  Top Layer w8: U3.65 2177.37,1022.37 2277,1122 2725,1122 2904,1301 2904,1582 3056,1734 3301,1734 P10.30 P10.29
PC9: P9.27 P9.28 U3.66 | length 1677.8
  Top Layer w8: U3.66 2175.06,1042.06 2272,1139 2717,1139 2889,1311 2889,1607 3064,1782 P9.28 P9.27
PC10: P8.11 P8.12 U3.78 | length 1063.9
  Top Layer w8: U3.78 1896.85,1400.85 1896.85,1661.85 2141,1906 2276,1906 P8.12
  Top Layer w10: P8.12 P8.11
PC11: P8.13 P8.14 U3.79 | length 987.3
  Top Layer w8: U3.79 1877.17,1410.17 1877.17,1668.17 2136,1927 2197,1927 P8.14
  Top Layer w10: P8.14 P8.13
PC12: P8.15 P8.16 U3.80 | length 918.3
  Top Layer w8: U3.80 1857.48,1419.44 1857.48,1687.48 P8.16
  Top Layer w10: P8.16 P8.15
PC13: P7.11 P7.12 U3.7 | length 2307
  Top Layer w10: v1(511,1081) 445,1015 445,435 591,289 847,289 P7.12 P7.11 ; v1(1268,1111) 1277.89,1101.11 U3.7
  Bottom Layer w10: v1(511,1081) 565,1135 1244,1135 v1(1268,1111)
PC14: P7.13 P7.14 R7.2 U3.8 | length 2503.7
  Top Layer w10: v1(510,1016) 465,971 465,445 603,307 929,307 P7.14 P7.13 ; R7.2 1079.86,1215.14 v1@1193.5,1101.5 ; v1(1194,1102) v1@1193.5,1101.5 ; U3.8 1213.57,1081.43 v1@1193.5,1101.5
  Bottom Layer w10: v1(510,1016) 596,1102 674,1102 ; 659,1102 674,1102 ; v1(1194,1102) 674,1102
PC15: P7.15 P7.16 R9.2 U3.9 | length 2457.8
  Top Layer w10: v1@515,962 v1(515,966) 482,933 482,455 608,329 1007,329 P7.16 P7.15 ; R9.2 1085.71,1138.29 v1(1162.26,1061.74) U3.9
  Bottom Layer w10: v1(515,966) 610.74,1061.74 v1(1162.26,1061.74)
PD0: P8.17 P8.18 U3.81 | length 885
  Top Layer w8: U3.81 1837.8,1423.8 1837.8,1767.8 P8.18
  Top Layer w10: P8.18 P8.17
PD1: P8.19 P8.20 U3.82 | length 851.7
  Top Layer w8: U3.82 1818.11,1431.11 1818.11,1848.11 P8.20
  Top Layer w10: P8.20 P8.19
PD2: P8.21 P8.22 U3.83 | length 818.5
  Top Layer w8: U3.83 1798.43,1440.43 1798.43,1928.43 P8.22
  Top Layer w10: P8.22 P8.21
PD3: P8.23 P8.24 U3.84 | length 806.5
  Top Layer w8: P8.24 1778.74,1957.26 1778.74,1448.74 U3.84
  Top Layer w11: P8.24 P8.23
PD4: P8.25 P8.26 U3.85 | length 839.8
  Top Layer w8: P8.26 1759.05,1876.95 1759.05,1462.05 U3.85
  Top Layer w11: P8.26 P8.25
PD5: P8.27 P8.28 U3.86 | length 873.1
  Top Layer w8: P8.28 1739.37,1796.63 1739.37,1476.37 U3.86
  Top Layer w11: P8.28 P8.27
PD6: P8.29 P8.30 U3.87 | length 917.5
  Top Layer w8: P8.30@1472,1983 1719.68,1735.32 1719.68,1483.68 U3.87
  Top Layer w11: P8.29 P8.30 P8.30@1472,1983
PD7: P8.31 P8.32 U3.88 | length 992.6
  Top Layer w8: P8.32 1414,1922 1504.46,1922 1700,1726.46 1700,1491 U3.88
  Top Layer w11: P8.32 P8.31
PD8: P10.19 P10.20 U3.55 | length 1775.4
  Top Layer w8: U3.55 2203.31,825.52 2336.79,959 2797,959 3071,1233 3300,1233 P10.20 P10.19
PD9: P9.17 P9.18 U3.56 | length 1378.8
  Top Layer w8: U3.56 2199.2,845.2 2328,974 2776,974 3084,1282 P9.18 P9.17
PD10: P10.21 P10.22 U3.57 | length 1827.4
  Top Layer w8: U3.57 2197.68,864.89 2322.79,990 2770,990 3024,1244 3024,1290 3066,1332 3299,1332 P10.22 P10.21
PD11: P9.19 P9.20 U3.58 | length 1431.4
  Top Layer w8: U3.58 2196.15,884.58 2318.57,1007 2765.79,1007 3009,1250.21 3009,1297.21 3093.79,1382 P9.20 P9.19
PD12: P10.23 P10.24 U3.59 | length 1877.7
  Top Layer w8: U3.59 2194.62,904.26 2313.36,1023 2759,1023 2994,1258 2994,1347 3078,1431 3298,1431 P10.24 P10.23
PD13: P9.21 P9.22 U3.60 | length 1484.5
  Top Layer w8: U3.60 2193.09,923.94 2307.15,1038 2752.79,1038 2979,1264.21 2979,1359 P9.22 P9.21
PD14: P10.25 P10.26 U3.61 | length 1943.8
  Top Layer w8: U3.61 2188.63,943.63 2300,1055 2746,1055 2964,1273 2964,1432 3064,1532 3299,1532 P10.26 P10.25
PD15: P9.23 P9.24 U3.62 | length 1547.3
  Top Layer w8: U3.62 2185.32,963.32 2292,1070 2739.79,1070 2949,1279.21 2949,1438.21 3092.79,1582 P9.24 P9.23
PE0: P8.47 P8.48 U3.97 | length 1590.9
  Top Layer w8: P8.48 762.5,1773.5 1433.96,1773.5 1470,1737.46 1470,1402.46 1522.83,1349.62 U3.97
  Top Layer w11: P8.48 P8.47
PE1: P8.49 P8.50 U3.98 | length 1705.9
  Top Layer w8: P8.50 453,1911 611,1753 1422,1753 1452,1723 1452,1395 1503.15,1343.85 U3.98
  Top Layer w11: P8.50 P8.49
PE2: P7.1 P7.2 U3.1 | length 2388.3
  Top Layer w10: P7.1 P7.2 318,318 318,1246 404,1332 1182,1332 1294.78,1219.22 U3.1@1405,1219.22
PE3: P7.3 P7.4 U3.2 | length 2372.7
  Top Layer w10: P7.3 P7.4 497,239 343,393 343,1239 416,1312 1176,1312 1288.47,1199.53 U3.2
PE4: P7.5 P7.6 U3.3 | length 2324.1
  Top Layer w10: v1(404,1183) 369,1148 369,410 547,232 604,232 P7.6 P7.5 ; v1(1182,1262) 1264.15,1179.85 U3.3
  Bottom Layer w10: v1(404,1183) 483,1262 v1(1182,1262)
PE5: P7.7 P7.8 U3.4 | length 2314.9
  Top Layer w10: v1(442,1154) 394,1106 394,418 562,250 686,250 P7.8 P7.7 ; v1(1183,1216) 1238.83,1160.17 U3.4
  Bottom Layer w10: v1(442,1154) 504,1216 v1(1183,1216)
PE6: P7.9 P7.10 U3.5 | length 2297.4
  Top Layer w10: v1(478,1120) 420,1062 420,429 581,268 768,268 P7.10 P7.9 ; v1(1186,1166) 1211.52,1140.48 U3.5
  Bottom Layer w10: v1(478,1120) 524,1166 v1(1186,1166)
PE7: P9.1 P9.2 U3.38 | length 1691.9
  Top Layer w8: U3.38 1700,542 1794,448 2335,448 2350,463 P9.2@3083,463
  Top Layer w10: P9.2@3083,463 P9.2 P9.1
PE8: P10.5 P10.6 U3.39 | length 2112.8
  Top Layer w8: U3.39 1719.68,553.32 1810,463 2323,463 2373.08,513.08 2423.08,513.08 2477,567 2854,567 2890,531 3298,531 P10.6
  Top Layer w10: P10.6 P10.5
PE9: P9.3 P9.4 U3.40 | length 1724.1
  Top Layer w8: U3.40 1739.37,562.63 1823,479 2167,479 2352,664 2799,664 2881,582 P9.4
  Top Layer w10: P9.4 P9.3
PE10: P10.7 P10.8 U3.41 | length 2089.6
  Top Layer w8: U3.41 1759.05,570.95 1835,495 2161.79,495 2347.79,681 2818,681 2868,631 3298,631 P10.8
  Top Layer w10: P10.8 P10.7
PE11: P9.5 P9.6 U3.42 | length 1636.9
  Top Layer w8: U3.42 1778.74,579.26 1848,510 2155.57,510 2344.57,699 P9.6@3085,699
  Top Layer w10: P9.6@3085,699 P9.6 P9.5
PE12: P10.9 P10.10 U3.43 | length 2015.1
  Top Layer w8: U3.43 1798.43,588.57 1862,525 2149.36,525 2340.36,716 3020,716 3037,733 3300,733 P10.10
  Top Layer w10: P10.10 P10.9
PE13: P9.7 P9.8 U3.44 | length 1589.2
  Top Layer w8: U3.44 1818.11,594.89 1871,542 2145.15,542 2336.15,733 3006,733 3055,782 P9.8 P9.7
PE14: P10.11 P10.12 U3.45 | length 1979
  Top Layer w8: U3.45 1837.8,604.2 1882,560 2107,560 2133,560 2402,829 3009,829 3296,829 P10.12 P10.11
PE15: P9.9 P9.10 U3.46 | length 1549.8
  Top Layer w8: U3.46 1857.48,617.52 1899,576 2101,576 2124,576 2398,850 3070,850 P9.10 P9.9
USB_DN: J1.2 R1.1 | length 103.1
  Top Layer w10: J1.2 256.59,1980.59 R1.1
USB_DP: J1.3 R3.1 | length 86.4
  Top Layer w10: J1.3 297,1955 R3.1@298,1954
VBAT: P6.4 U3.6 | length 1245.4
  Top Layer w10: U3.6 1396.07,1121 v1(1463,1121)
  Bottom Layer w10: v1(1463,1121) 1547.94,1205.94 P6.4
VCC_MCU: C6.1 C16.2 C18.1 C19.1 C20.1 C21.1 L1.1 P4.2 P6.1 P6.2 R17.2 R19.2 U3.11 U3.28 U3.50 U3.75 U3.100 | length 5391.2
  Top Layer w11: C6.1 C6.1@1299.13,1287.13 ; U3.75@1986.13,1219.22 1986.13,1361.13 C18.1
  Top Layer w12: C20.1 1104,1031 v2(1263,1031) 1271.63,1022.37 U3.11 ; C6.1@1299.13,1287.13 v1(1346,1287.13) U3.100 ; C19.1 1503.15,587.15 U3.28 ; U3.50 1936.22,650.78 1951,636 1997,636 C16.2
  Top Layer w24: R17.2 966.71,842.71 944,820 944,718 985,677 R19.2 1007,707 v1(1014.28,714.28) 1020,720 1096,720 1111,705 1111,561 L1.1@1155,517 ; C18.1 C18.1@1995,1366
  Top Layer w28: C18.1@1995,1366 v1(2048,1366)
  Top Layer w30: C21.1@1155,443 C21.1 v1(1155,480) 1155,517 L1.1 ; v1(1451,570) C19.1 ; v1(2021,691) 2023,689 C16.2
  Bottom Layer w12: v2(1263,1031) 1308,1031 1345,1068
  Bottom Layer w20: P4.2 2544,1531 2604,1471 2604,1407.94 P6.1 P6.2
  Bottom Layer w28: v1(946,715) 1261,715 1345,799 1345,1068 1345,1291 1420,1366 v1(2048,1366) 2107,1366 2272,1531 P4.2
  Bottom Layer w30: v1(1155,480) 1361,480 1439,558 v1@1449,568 ; v1(1451,570) v1@1449,568 ; v1(2021,691) 1898,568 v1@1449,568
VCC_UART: C2.2 U1.5 | length 320.1
  Top Layer w16: U1.5 950,1532.8 972.8,1532.8 995,1555 1000,1560 C2.2@1000,1719
VDD: P2.2 P4.1 P5.1 R5.3 R12.2 | length 1440.5
  Top Layer w12: R5.3 2646,624 P5.1
  Top Layer w20: v1(2626,769) R12.2
  Top Layer w30: P4.1 2537,1631 2637,1531 P2.2
  Bottom Layer w20: P5.1 2626,644 v1(2626,769) 2626,1003 2779,1156 2779,1458 P2.2
VREF+: C22.1 L1.2 U3.21 | length 462.8
  Top Layer w12: C22.1 1256,601 1279,624 1279,795 1309.52,825.52 U3.21
  Top Layer w24: C22.1 1215,549 L1.2
VREF-: C22.2 L2.2 U3.20 | length 403
  Top Layer w12: C22.2 1236.86,682.86 L2.2 1250,694.86 1250,799 1296.2,845.2 U3.20
pads on no net: J3.3 J3.5 J3.11 J3.13 J3.17 U1.1 U1.2 U1.11 U1.12 U1.13 U1.14 U1.15 U1.16 U1.17 U1.18 U1.20 U2.4 U3.73

## Polygon pours and split planes (outlines as drawn)
GND on Top Layer "Top Layer-No Net" (solid, remove dead copper, pour order 1000): 0,2165 0,0 3620,0 3620,2165
GND on Top Layer "Top Layer-No Net" (solid, pour order 1000): 1315,631 1315,579.1 1314.25,578.35 1327,565.61 1327,551 1327,541 1317,531 1326,522 1326,422.24 1347.24,422.24 1350,425 1351,426 1351,437 1351,627 1347,631 1342,636 1329,636 1320,636 1315,631
GND on Bottom Layer "Top Layer-No Net" (solid, remove dead copper, pour order 1001): 0,2165 0,0 3620,0 3620,2165

## Keep-outs
Keep-Out Layer:
  lines w5: 0,66 ccw(c66.03,65.55) 66,-0.48 ; 0.52,2098.5 cw(c66.55,2098.48) 67,2164.5 ; 3553,0 ccw(c3553.45,66.03) 3619.48,66 ; 3554,2165 cw(c3553.97,2098.97) 3620,2098.52 ; 0,0 0,2165 3620,2165 3620,0 0,0

## Silkscreen, mask and mechanical layers (free items; w line width, h text height)
Top Overlay:
  lines w8: 403,233 403,349 402,350 2902,350 2903,349 2903,233 ; 403,1933 403,1814 2903,1814 2903,1933 ; 1700,1481 1940,1481 ; 1700,1681 1940,1681 ; 1701,1481 1701,1681 ; 2424,1481 2166,1481 2166,1681 2424,1681 ; 2562,1156 2112,1156 2112,1356 2562,1356 ; 2656,1381 2550,1381 2550,1681 2656,1681 ; 2706,365 2901,365 2901,665 2706,665 ; 3052,432 2934,432 2934,2132 3052,2132 ; 3399,432 3281,432 3281,2132 3405,2132
  text "A10" at 2986,2039 h35 r90
  text "A10" at 3035,2039 h35 r90
  text "3V3" at 3335,2035 h35 r90
  text "3V3" at 3384,2035 h35 r90
  text "A9" at 2986,1952 h35 r90
  text "A9" at 3035,1952 h35 r90
  text "5V" at 3335,1951 h35 r90
  text "5V" at 3384,1951 h35 r90
  text "E1" at 437,1881 h35
  text "E0" at 529,1881 h35
  text "B9" at 632,1881 h35
  text "B8" at 729,1881 h35
  text "B7" at 834,1881 h35
  text "B6" at 934,1881 h35
  text "B5" at 1029,1881 h35
  text "B4" at 1129,1881 h35
  text "B3" at 1227,1881 h35
  text "D7" at 1326,1881 h35
  text "D6" at 1426,1881 h35
  text "D5" at 1527,1881 h35
  text "D4" at 1628,1881 h35
  text "D3" at 1727,1881 h35
  text "D2" at 1827,1881 h35
  text "D1" at 1933,1881 h35
  text "D0" at 2024,1881 h35
  text "C12" at 2110,1881 h35
  text "C11" at 2216,1881 h35
  text "C10" at 2313,1881 h35
  text "A15" at 2416,1881 h35
  text "A14" at 2514,1881 h35
  text "A13" at 2614,1881 h35
  text "A12" at 2716,1881 h35
  text "A11" at 2817,1881 h35
  text "A8" at 2986,1855 h35 r90
  text "A8" at 3035,1855 h35 r90
  text "C8" at 3335,1854 h35 r90
  text "C8" at 3384,1854 h35 r90
  text "E1" at 437,1832 h35
  text "E0" at 529,1832 h35
  text "B9" at 632,1832 h35
  text "B8" at 729,1832 h35
  text "B7" at 834,1832 h35
  text "B6" at 934,1832 h35
  text "B5" at 1029,1832 h35
  text "B4" at 1129,1832 h35
  text "B3" at 1227,1832 h35
  text "D7" at 1326,1832 h35
  text "D6" at 1426,1832 h35
  text "D5" at 1527,1832 h35
  text "D4" at 1628,1832 h35
  text "D3" at 1727,1832 h35
  text "D2" at 1827,1832 h35
  text "D1" at 1933,1832 h35
  text "D0" at 2024,1832 h35
  text "C12" at 2110,1832 h35
  text "C11" at 2216,1832 h35
  text "C10" at 2313,1832 h35
  text "A15" at 2416,1832 h35
  text "A14" at 2514,1832 h35
  text "A13" at 2614,1832 h35
  text "A12" at 2716,1832 h35
  text "A11" at 2817,1832 h35
  text "USB" at 225,1800 h80
  text "C9" at 2986,1751 h35 r90
  text "C9" at 3035,1751 h35 r90
  text "C6" at 3335,1750 h35 r90
  text "C6" at 3384,1750 h35 r90
  text "C7" at 2986,1654 h35 r90
  text "C7" at 3035,1654 h35 r90
  text "D14" at 3335,1645 h35 r90
  text "D14" at 3384,1645 h35 r90
  text "A10" at 1841,1615 h35
  text "RXD" at 1716,1614 h35
  text "VDD" at 2312,1611 h35
  text "5V" at 2585,1610 h35
  text "D15" at 2986,1548 h35 r90
  text "D15" at 3035,1548 h35 r90
  text "D12" at 3335,1542 h35 r90
  text "D12" at 3384,1542 h35 r90
  text "VCC_MCU" at 2180,1514 h35
  text "A9" at 1861,1513 h35
  text "TXD" at 1716,1512 h35
  text "VDD" at 2560,1510 h35
  text "D13" at 2986,1448 h35 r90
  text "D13" at 3035,1448 h35 r90
  text "D10" at 3335,1441 h35 r90
  text "D10" at 3384,1441 h35 r90
  text "UART" at 225,1405 h80
  text "3V3" at 2560,1405 h35
  text "D8" at 3335,1354 h35 r90
  text "D8" at 3384,1354 h35 r90
  text "D11" at 2986,1343 h35 r90
  text "D11" at 3035,1343 h35 r90
  text "BOOT0" at 2124,1285 h35
  text "VCC_MCU" at 2315,1285 h35
  text "D9" at 2986,1250 h35 r90
  text "D9" at 3035,1250 h35 r90
  text "B14" at 3335,1245 h35 r90
  text "B14" at 3384,1245 h35 r90
  text "VCC_MCU" at 2317,1188 h35
  text "VBAT" at 2127,1176.34 h35
  text "B15" at 2986,1143 h35 r90
  text "B15" at 3035,1143 h35 r90
  text "B12" at 3335,1139 h35 r90
  text "B12" at 3384,1139 h35 r90
  text "POWER" at 799,1130 h35
  text "B13" at 2986,1042 h35 r90
  text "B13" at 3035,1042 h35 r90
  text "B10" at 3335,1041 h35 r90
  text "B10" at 3384,1041 h35 r90
  text "B11" at 2986,945 h35 r90
  text "B11" at 3035,945 h35 r90
  text "E14" at 3335,939 h35 r90
  text "E14" at 3384,939 h35 r90
  text "E15" at 2986,844 h35 r90
  text "E15" at 3035,844 h35 r90
  text "E12" at 3335,839 h35 r90
  text "E12" at 3384,839 h35 r90
  text "LD" at 2807,803 h35
  text "E13" at 2986,741 h35 r90
  text "E13" at 3035,741 h35 r90
  text "E10" at 3335,740 h35 r90
  text "E10" at 3384,740 h35 r90
  text "E8" at 3335,657 h35 r90
  text "E8" at 3384,657 h35 r90
  text "E11" at 2986,651 h35 r90
  text "E11" at 3035,651 h35 r90
  text "PUL_UP" at 2716,595 h35
  text "E9" at 2986,551 h35 r90
  text "E9" at 3035,551 h35 r90
  text "LD-" at 3335,547 h35 r90
  text "GND" at 3384,547 h35 r90
  text "WKUP" at 2716,495 h35
  text "E7" at 2986,453 h35 r90
  text "E7" at 3035,453 h35 r90
  text "GND" at 3335,440 h35 r90
  text "GND" at 3384,440 h35 r90
  text "PUL_DN" at 2716,395 h35
  text "ADC" at 2193,385 h80
  text "E2" at 430,299 h35
  text "E3" at 525,299 h35
  text "E4" at 625,299 h35
  text "E5" at 725,299 h35
  text "E6" at 830,299 h35
  text "C13" at 910,299 h35
  text "C14" at 1011,299 h35
  text "C15" at 1111,299 h35
  text "C0" at 1223,299 h35
  text "C1" at 1325,299 h35
  text "C2" at 1421,299 h35
  text "C3" at 1519,299 h35
  text "A0" at 1619,299 h35
  text "A1" at 1726,299 h35
  text "A2" at 1818,299 h35
  text "A3" at 1918,299 h35
  text "A4" at 2021,299 h35
  text "A5" at 2119,299 h35
  text "A6" at 2223,299 h35
  text "A7" at 2322,299 h35
  text "C4" at 2424,299 h35
  text "C5" at 2521,299 h35
  text "B0" at 2625,299 h35
  text "B1" at 2728,299 h35
  text "B2" at 2822,299 h35
  text "RESET" at 2959,292 h80
  text "E2" at 430,250 h35
  text "E3" at 525,250 h35
  text "E4" at 625,250 h35
  text "E5" at 725,250 h35
  text "E6" at 830,250 h35
  text "C13" at 910,250 h35
  text "C14" at 1011,250 h35
  text "C15" at 1111,250 h35
  text "C0" at 1223,250 h35
  text "C1" at 1325,250 h35
  text "C2" at 1421,250 h35
  text "C3" at 1519,250 h35
  text "A0" at 1619,250 h35
  text "A1" at 1726,250 h35
  text "A2" at 1818,250 h35
  text "A3" at 1918,250 h35
  text "A4" at 2021,250 h35
  text "A5" at 2119,250 h35
  text "A6" at 2223,250 h35
  text "A7" at 2322,250 h35
  text "C4" at 2424,250 h35
  text "C5" at 2521,250 h35
  text "B0" at 2625,250 h35
  text "B1" at 2728,250 h35
  text "B2" at 2822,250 h35
  text "WKUP" at 2959,77 h80
Bottom Overlay:
  drawing of 2012 lines, arcs and shapes, not listed
  text "A10" at 2991,2118 h35 r90
  text "A10" at 3036,2118 h35 r90
  text "3V3" at 3340,2118 h35 r90
  text "3V3" at 3385,2118 h35 r90
  text "A9" at 2991,2009 h35 r90
  text "A9" at 3036,2009 h35 r90
  text "5V" at 3340,2008 h35 r90
  text "5V" at 3385,2008 h35 r90
  text "A8" at 2990,1909 h35 r90
  text "A8" at 3035,1909 h35 r90
  text "C8" at 3339,1908 h35 r90
  text "C8" at 3384,1908 h35 r90
  text "E1" at 468,1881 h35
  text "E0" at 577,1881 h35
  text "B9" at 678,1881 h35
  text "B8" at 778,1881 h35
  text "B7" at 877,1881 h35
  text "B6" at 975,1881 h35
  text "B5" at 1080,1881 h35
  text "B4" at 1180,1881 h35
  text "B3" at 1278,1881 h35
  text "D7" at 1377,1881 h35
  text "D6" at 1477,1881 h35
  text "D5" at 1576,1881 h35
  text "D4" at 1681,1881 h35
  text "D3" at 1778,1881 h35
  text "D2" at 1876,1881 h35
  text "D0" at 2077,1881 h35
  text "C12" at 2193,1881 h35
  text "C11" at 2284,1881 h35
  text "C10" at 2391,1881 h35
  text "A15" at 2490,1881 h35
  text "A14" at 2591,1881 h35
  text "A13" at 2693,1881 h35
  text "D1" at 1973,1880 h35
  text "A12" at 2793,1880 h35
  text "A11" at 2888,1880 h35
  text "E1" at 468,1836 h35
  text "E0" at 577,1836 h35
  text "B9" at 678,1836 h35
  text "B8" at 778,1836 h35
  text "B7" at 877,1836 h35
  text "B6" at 975,1836 h35
  text "B5" at 1080,1836 h35
  text "B4" at 1180,1836 h35
  text "B3" at 1278,1836 h35
  text "D7" at 1377,1836 h35
  text "D6" at 1477,1836 h35
  text "D5" at 1576,1836 h35
  text "D4" at 1681,1836 h35
  text "D3" at 1778,1836 h35
  text "D2" at 1876,1836 h35
  text "D0" at 2077,1836 h35
  text "C12" at 2193,1836 h35
  text "C11" at 2284,1836 h35
  text "C10" at 2391,1836 h35
  text "A15" at 2490,1836 h35
  text "A14" at 2591,1836 h35
  text "A13" at 2693,1836 h35
  text "D1" at 1973,1835 h35
  text "A12" at 2793,1835 h35
  text "A11" at 2888,1835 h35
  text "C9" at 2990,1809 h35 r90
  text "C9" at 3035,1809 h35 r90
  text "C6" at 3339,1808 h35 r90
  text "C6" at 3384,1808 h35 r90
  text "SWDCLK" at 2571,1781 h35 r90
  text "SWDIO" at 2671,1781 h35 r90
  text "D14" at 3339,1721 h35 r90
  text "D14" at 3384,1721 h35 r90
  text "C7" at 2990,1709 h35 r90
  text "C7" at 3035,1709 h35 r90
  text "D15" at 2990,1617 h35 r90
  text "D15" at 3035,1617 h35 r90
  text "D12" at 3339,1617 h35 r90
  text "D12" at 3384,1617 h35 r90
  text "D10" at 3339,1519 h35 r90
  text "D10" at 3384,1519 h35 r90
  text "D13" at 2990,1518 h35 r90
  text "D13" at 3035,1518 h35 r90
  text "D11" at 2990,1413 h35 r90
  text "D11" at 3035,1413 h35 r90
  text "D8" at 3339,1407 h35 r90
  text "D8" at 3384,1407 h35 r90
  text "B14" at 3339,1318 h35 r90
  text "B14" at 3384,1318 h35 r90
  text "D9" at 2990,1309 h35 r90
  text "D9" at 3035,1309 h35 r90
  text "B15" at 2991,1224 h35 r90
  text "B15" at 3036,1224 h35 r90
  text "B12" at 3340,1218 h35 r90
  text "B12" at 3385,1218 h35 r90
  text "MM32F103VxT6_CoreBoard V1.0" at 1500,1201 h60
  text "B13" at 2990,1122 h35 r90
  text "B13" at 3035,1122 h35 r90
  text "B10" at 3339,1121 h35 r90
  text "B10" at 3384,1121 h35 r90
  text "2018-5-15" at 1151,1089 h60
  text "E14" at 3339,1023 h35 r90
  text "E14" at 3384,1023 h35 r90
  text "B11" at 2990,1016 h35 r90
  text "B11" at 3035,1016 h35 r90
  text "E15" at 2990,921 h35 r90
  text "E15" at 3035,921 h35 r90
  text "E12" at 3339,921 h35 r90
  text "E12" at 3384,921 h35 r90
  text "E13" at 2990,817 h35 r90
  text "E13" at 3035,817 h35 r90
  text "E10" at 3339,816 h35 r90
  text "E10" at 3384,816 h35 r90
  text "E11" at 2990,713 h35 r90
  text "E11" at 3035,713 h35 r90
  text "E8" at 3339,708 h35 r90
  text "E8" at 3384,708 h35 r90
  text "LD-" at 3339,632 h35 r90
  text "GND" at 3384,632 h35 r90
  text "E9" at 2990,605 h35 r90
  text "E9" at 3035,605 h35 r90
  text "GND" at 3339,530 h35 r90
  text "GND" at 3384,530 h35 r90
  text "E7" at 2990,507 h35 r90
  text "E7" at 3035,507 h35 r90
  text "E2" at 478,295 h35
  text "E3" at 573,295 h35
  text "E4" at 679,295 h35
  text "E5" at 778,295 h35
  text "E6" at 877,295 h35
  text "C13" at 992,295 h35
  text "C14" at 1092,295 h35
  text "C15" at 1197,295 h35
  text "C0" at 1281,295 h35
  text "C1" at 1380,295 h35
  text "C2" at 1483,295 h35
  text "C3" at 1582,295 h35
  text "A0" at 1682,295 h35
  text "A1" at 1777,295 h35
  text "A2" at 1884,295 h35
  text "A4" at 2084,295 h35
  text "A5" at 2183,295 h35
  text "A6" at 2280,295 h35
  text "A7" at 2382,295 h35
  text "C4" at 2482,295 h35
  text "C5" at 2579,295 h35
  text "B0" at 2679,295 h35
  text "A3" at 1983,294 h35
  text "B1" at 2775,294 h35
  text "B2" at 2881,294 h35
  text "E2" at 478,250 h35
  text "E3" at 573,250 h35
  text "E4" at 679,250 h35
  text "E5" at 778,250 h35
  text "E6" at 877,250 h35
  text "C13" at 992,250 h35
  text "C14" at 1092,250 h35
  text "C15" at 1197,250 h35
  text "C0" at 1281,250 h35
  text "C1" at 1380,250 h35
  text "C2" at 1483,250 h35
  text "C3" at 1582,250 h35
  text "A0" at 1682,250 h35
  text "A1" at 1777,250 h35
  text "A2" at 1884,250 h35
  text "A4" at 2084,250 h35
  text "A5" at 2183,250 h35
  text "A6" at 2280,250 h35
  text "A7" at 2382,250 h35
  text "C4" at 2482,250 h35
  text "C5" at 2579,250 h35
  text "B0" at 2679,250 h35
  text "A3" at 1983,249 h35
  text "B1" at 2775,249 h35
  text "B2" at 2881,249 h35
Top Solder:
  rectangle: 539,959 665,1278
Mechanical 1:
  lines w5: 0,66 ccw(c66.03,65.55) 66,-0.48 ; 0.52,2098.5 cw(c66.55,2098.48) 67,2164.5 ; 3553.52,0 ccw(c3553.97,66.03) 3620,66 ; 3554,2164.5 cw(c3553.97,2098.48) 3620,2098.02 ; 0,0 0,2165 3620,2165 3620,0 0,0

## Dimensions
0,2165 to 3620,2165 on Mechanical 1
0,2165 to 0,0 on Mechanical 1